# Altium PCB kernel.PcbDoc (part 4 of 7)
Units mil, origin at the board's own origin, x right, y up, seen from the top; angles counter-clockwise.
Board outline 2360 x 2450.34 mil, 6 copper layers (Top Layer, GND, SIGNAL, POWER, GND1, Bottom Layer), stack 32.112 mil thick; 150 components, 174 nets, 684 pads, 710 vias.
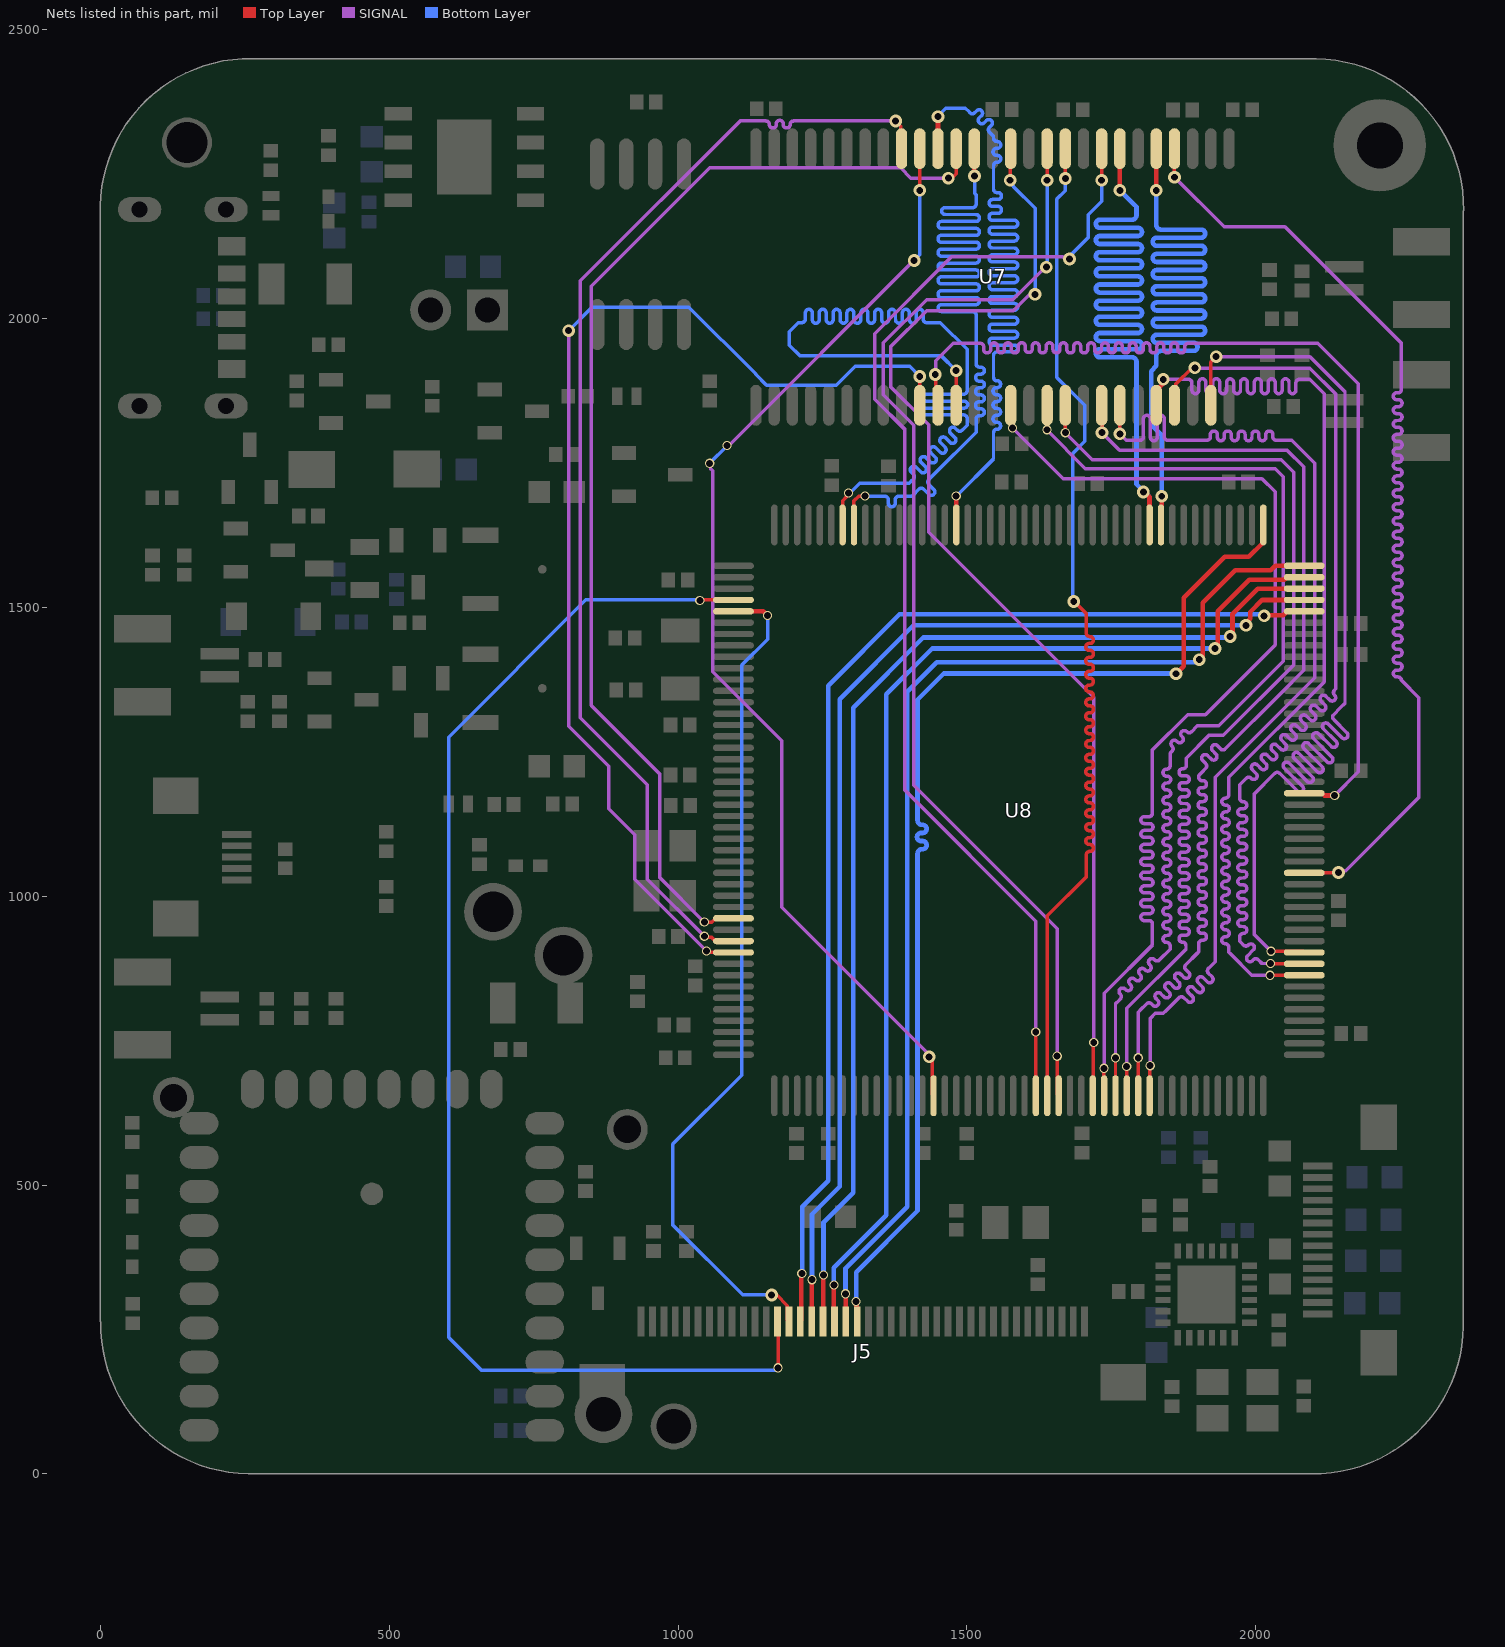
[diagram p7: the nets of this part, all layers, seen from the top]

## Via types
v1: diameter 22, hole 12, Top Layer to Bottom Layer, tented both sides, 583 vias
v2: diameter 16, hole 12, Top Layer to Bottom Layer, tented both sides, 111 vias
v3: diameter 23.62, hole 15.75, Top Layer to Bottom Layer, 8 vias
v4: diameter 28, hole 14, Top Layer to Bottom Layer, 5 vias
v5: diameter 22, hole 12, Top Layer to Bottom Layer, 3 vias

## Nets (pads, with @x,y where several pads share a name; then routed paths per layer and width w, separated by ;. In a path a pad name is that pad's centre, name@x,y a point inside that pad or via, vN(x,y) a via of type N, cw(c..) or ccw(c..) an arc to the next point about the centre after c; other vN are vias at no path point) (continued)
FMC_D1: U7.4 U8.105 | length 2026.3
  Top Layer w6: v1(1859.41,2244.76) U7.4@1859.41,2294.26 ; U8.105@2084.09,1040.59 2084.47,1040.98 2142.83,1040.98 v1(2143.22,1041.36)
  SIGNAL w6: v1(1859.41,2244.76) 1945.41,2158.76 2050.73,2158.76 2252.38,1957.11 2252.38,1887.3 2252.38,1877.69 cw(c2246.38,1877.69) 2246.38,1871.69 2244.33,1871.69 ccw(c2244.33,1865.69) 2244.33,1859.69 2247.38,1859.69 cw(c2247.38,1853.69) 2247.38,1847.69 2244.33,1847.69 ccw(c2244.33,1841.69) 2244.33,1835.69 2247.38,1835.69 cw(c2247.38,1829.69) 2247.38,1823.69 2244.33,1823.69 ccw(c2244.33,1817.69) 2244.33,1811.69 2247.38,1811.69 cw(c2247.38,1805.69) 2247.38,1799.69 2244.33,1799.69 ccw(c2244.33,1793.69) 2244.33,1787.69 2247.38,1787.69 cw(c2247.38,1781.69) 2247.38,1775.69 2244.33,1775.69 ccw(c2244.33,1769.69) 2244.33,1763.69 2247.38,1763.69 cw(c2247.38,1757.69) 2247.38,1751.69 2244.33,1751.69 ccw(c2244.33,1745.69) 2244.33,1739.69 2247.38,1739.69 cw(c2247.38,1733.69) 2247.38,1727.69 2244.33,1727.69 ccw(c2244.33,1721.69) 2244.33,1715.69 2247.38,1715.69 cw(c2247.38,1709.69) 2247.38,1703.69 2244.33,1703.69 ccw(c2244.33,1697.69) 2244.33,1691.69 2247.38,1691.69 cw(c2247.38,1685.69) 2247.38,1679.69 2244.33,1679.69 ccw(c2244.33,1673.69) 2244.33,1667.69 2247.38,1667.69 cw(c2247.38,1661.69) 2247.38,1655.69 2244.33,1655.69 ccw(c2244.33,1649.69) 2244.33,1643.69 2247.38,1643.69 cw(c2247.38,1637.69) 2247.38,1631.69 2244.33,1631.69 ccw(c2244.33,1625.69) 2244.33,1619.69 2247.38,1619.69 cw(c2247.38,1613.69) 2247.38,1607.69 2244.33,1607.69 ccw(c2244.33,1601.69) 2244.33,1595.69 2247.38,1595.69 cw(c2247.38,1589.69) 2247.38,1583.69 2244.33,1583.69 ccw(c2244.33,1577.69) 2244.33,1571.69 2247.38,1571.69 cw(c2247.38,1565.69) 2247.38,1559.69 2244.33,1559.69 ccw(c2244.33,1553.69) 2244.33,1547.69 2247.38,1547.69 cw(c2247.38,1541.69) 2247.38,1535.69 2244.33,1535.69 ccw(c2244.33,1529.69) 2244.33,1523.69 2247.38,1523.69 cw(c2247.38,1517.69) 2247.38,1511.69 2244.33,1511.69 ccw(c2244.33,1505.69) 2244.33,1499.69 2247.38,1499.69 cw(c2247.38,1493.69) 2247.38,1487.69 2244.33,1487.69 ccw(c2244.33,1481.69) 2244.33,1475.69 2247.38,1475.69 cw(c2247.38,1469.69) 2247.38,1463.69 2244.33,1463.69 ccw(c2244.33,1457.69) 2244.33,1451.69 2247.38,1451.69 cw(c2247.38,1445.69) 2247.38,1439.69 2244.33,1439.69 ccw(c2244.33,1433.69) 2244.33,1427.69 2247.38,1427.69 cw(c2247.38,1421.69) 2247.38,1415.69 2244.33,1415.69 ccw(c2244.33,1409.69) 2244.33,1403.69 2247.38,1403.69 cw(c2247.38,1397.69) 2247.38,1391.69 2244.33,1391.69 ccw(c2244.33,1385.69) 2244.33,1379.69 2246.38,1379.69 cw(c2246.38,1373.69) 2252.38,1373.69 2282.27,1343.8 2282.27,1170.98 2155.71,1044.42 2146.28,1044.42 v1(2143.22,1041.36)
FMC_D2: U7.5 U8.142 | length 1978.7
  Top Layer w8: v1(1827.91,2222.22) U7.5@1827.91,2294.26 ; U8.142@1836.06,1642.95 1837.39,1644.28 v1(1837.39,1692.6)
  Bottom Layer w8: v1(1827.91,2222.22) 1827.91,2193.39 1827.91,2162.14 ccw(c1835.91,2162.14) 1835.91,2154.14 1905.6,2154.14 cw(c1905.6,2147.14) 1905.6,2140.14 1828.91,2140.14 ccw(c1828.91,2133.14) 1828.91,2126.14 1905.6,2126.14 cw(c1905.6,2119.14) 1905.6,2112.14 1828.91,2112.14 ccw(c1828.91,2105.14) 1828.91,2098.14 1905.6,2098.14 cw(c1905.6,2091.14) 1905.6,2084.14 1828.91,2084.14 ccw(c1828.91,2077.14) 1828.91,2070.14 1905.6,2070.14 cw(c1905.6,2063.14) 1905.6,2056.14 1828.91,2056.14 ccw(c1828.91,2049.14) 1828.91,2042.14 1905.6,2042.14 cw(c1905.6,2035.14) 1905.6,2028.14 1828.91,2028.14 ccw(c1828.91,2021.14) 1828.91,2014.14 1905.6,2014.14 cw(c1905.6,2007.14) 1905.6,2000.14 1828.91,2000.14 ccw(c1828.91,1993.14) 1828.91,1986.14 1905.6,1986.14 cw(c1905.6,1979.14) 1905.6,1972.14 1828.91,1972.14 ccw(c1828.91,1965.14) 1828.91,1958.14 1892.37,1958.14 cw(c1892.37,1951.14) 1892.37,1944.14 1835.91,1944.14 ccw(c1835.91,1936.14) 1827.91,1936.14 1827.91,1918.14 1819,1909.23 1819,1816.65 1837.39,1798.26 v1(1837.39,1692.6)
FMC_D3: U7.7 U8.143 | length 1997.7
  Top Layer w8: v1(1764.92,2222.22) U7.7@1764.92,2294.26 ; v1(1805.5,1699.96) 1807.46,1699.96 1816.11,1691.31 1816.11,1643.23 U8.143@1816.38,1642.95
  Bottom Layer w8: v1(1764.92,2222.22) 1789.98,2197.15 1793.74,2193.39 1793.74,2179.15 cw(c1785.74,2179.15) 1785.74,2171.15 1730.28,2171.15 ccw(c1730.28,2164.15) 1730.28,2157.15 1796.25,2157.15 cw(c1796.25,2150.15) 1796.25,2143.15 1730.28,2143.15 ccw(c1730.28,2136.15) 1730.28,2129.15 1796.25,2129.15 cw(c1796.25,2122.15) 1796.25,2115.15 1730.28,2115.15 ccw(c1730.28,2108.15) 1730.28,2101.15 1796.25,2101.15 cw(c1796.25,2094.15) 1796.25,2087.15 1730.28,2087.15 ccw(c1730.28,2080.15) 1730.28,2073.15 1796.25,2073.15 cw(c1796.25,2066.15) 1796.25,2059.15 1730.28,2059.15 ccw(c1730.28,2052.15) 1730.28,2045.15 1796.25,2045.15 cw(c1796.25,2038.15) 1796.25,2031.15 1730.28,2031.15 ccw(c1730.28,2024.15) 1730.28,2017.15 1796.25,2017.15 cw(c1796.25,2010.15) 1796.25,2003.15 1730.28,2003.15 ccw(c1730.28,1996.15) 1730.28,1989.15 1796.25,1989.15 cw(c1796.25,1982.15) 1796.25,1975.15 1730.28,1975.15 ccw(c1730.28,1968.15) 1730.28,1961.15 1796.25,1961.15 cw(c1796.25,1954.15) 1796.25,1947.15 1730.28,1947.15 ccw(c1730.28,1940.15) 1730.28,1933.15 1785.74,1933.15 cw(c1785.74,1925.15) 1793.74,1925.15 1793.74,1912.24 1793.74,1713.68 1815.84,1691.58
FMC_D4: U7.8 U8.68 | length 2039.8
  Top Layer w6: U8.68@1619.53,654.77 v2@1619.53,765 ; v1(1733.43,2239.63) U7.8@1733.43,2294.26
  SIGNAL w6: v2@1619.53,765 1619.53,956.74 1392.85,1183.42 1392.85,1808.18 1340.6,1860.43 1340.6,1974.17 1473.49,2107.06 1666.3,2107.06 1666.86,2106.5 1674.76,2106.5 v1(1677.82,2103.44)
  Bottom Layer w6: v1@1676.52,2106.68 1710.28,2140.45 1710.28,2179.82 1733.43,2202.96 v1(1733.43,2239.63)
  other v2: 1619.28,765.26
FMC_D5: U7.10 U8.69 | length 1974.3
  Top Layer w6: U8.69@1639.21,654.77 1639.21,966.17 1707.1,1034.07 1707.1,1057.98 ; v1(1670.43,2242.57) U7.10@1670.43,2294.26 ; v1(1685.04,1510.5) 1685.45,1510.5 1707.1,1488.84 1707.1,1466.67 ; 1706.82,1056.7 1706.82,1071.7 cw(c1712.82,1071.7) 1712.82,1077.7 1713.21,1077.7 ccw(c1713.21,1083.7) 1713.21,1089.7 1711.82,1089.7 cw(c1711.82,1095.7) 1711.82,1101.7 1713.21,1101.7 ccw(c1713.21,1107.7) 1713.21,1113.7 1711.82,1113.7 cw(c1711.82,1119.7) 1711.82,1125.7 1713.21,1125.7 ccw(c1713.21,1131.7) 1713.21,1137.7 1711.82,1137.7 cw(c1711.82,1143.7) 1711.82,1149.7 1713.21,1149.7 ccw(c1713.21,1155.7) 1713.21,1161.7 1711.82,1161.7 cw(c1711.82,1167.7) 1711.82,1173.7 1713.21,1173.7 ccw(c1713.21,1179.7) 1713.21,1185.7 1711.82,1185.7 cw(c1711.82,1191.7) 1711.82,1197.7 1713.21,1197.7 ccw(c1713.21,1203.7) 1713.21,1209.7 1711.82,1209.7 cw(c1711.82,1215.7) 1711.82,1221.7 1713.21,1221.7 ccw(c1713.21,1227.7) 1713.21,1233.7 1711.82,1233.7 cw(c1711.82,1239.7) 1711.82,1245.7 1713.21,1245.7 ccw(c1713.21,1251.7) 1713.21,1257.7 1711.82,1257.7 cw(c1711.82,1263.7) 1711.82,1269.7 1713.21,1269.7 ccw(c1713.21,1275.7) 1713.21,1281.7 1711.82,1281.7 cw(c1711.82,1287.7) 1711.82,1293.7 1713.21,1293.7 ccw(c1713.21,1299.7) 1713.21,1305.7 1711.82,1305.7 cw(c1711.82,1311.7) 1711.82,1317.7 1713.21,1317.7 ccw(c1713.21,1323.7) 1713.21,1329.7 1711.82,1329.7 cw(c1711.82,1335.7) 1711.82,1341.7 1713.21,1341.7 ccw(c1713.21,1347.7) 1713.21,1353.7 1711.82,1353.7 cw(c1711.82,1359.7) 1711.82,1365.7 1713.21,1365.7 ccw(c1713.21,1371.7) 1713.21,1377.7 1711.82,1377.7 cw(c1711.82,1383.7) 1711.82,1389.7 1713.21,1389.7 ccw(c1713.21,1395.7) 1713.21,1401.7 1711.82,1401.7 cw(c1711.82,1407.7) 1711.82,1413.7 1713.21,1413.7 ccw(c1713.21,1419.7) 1713.21,1425.7 1711.82,1425.7 cw(c1711.82,1431.7) 1711.82,1437.7 1713.21,1437.7 ccw(c1713.21,1443.7) 1713.21,1449.7 1712.82,1449.7 cw(c1712.82,1455.7) 1706.82,1455.7 1706.82,1465.38
  Bottom Layer w6: v1(1670.43,2242.57) 1670.43,2221.52 1655.97,2207.06 1655.97,1898.2 1704.17,1850 1704.17,1787.54 1683.12,1766.49 1683.12,1512.42 v1(1685.04,1510.5)
FMC_D6: U7.11 U8.70 | length 1971.1
  Top Layer w6: v1(1638.94,2239.63) U7.11@1638.94,2294.26 ; v2(1656.31,723.26) 1656.31,657.36 U8.70@1658.9,654.77
  SIGNAL w6: v1(1637.65,2089.06) 1635.88,2089.06 1579.61,2032.79 1430.29,2032.79 1355.47,1957.97 1355.47,1867.98 1408.17,1815.27 1408.17,1192.13 1656.31,944 v2(1656.31,723.26)
  Bottom Layer w6: v1(1637.65,2089.06) 1637.65,2092.06 1638.94,2093.35 v1(1638.94,2239.63)
FMC_D7: U7.13 U8.73 | length 2001.1
  Top Layer w6: v1(1575,2239.63) 1575,2293.31 U7.13@1575.95,2294.26 ; U8.73@1717.95,654.77 1718.81,655.63 1718.81,746.21 v2(1719.66,747.06)
  SIGNAL w6: v1(1618.08,2042.07) 1608.67,2042.07 1580.22,2013.63 1430.27,2013.63 1367.89,1951.26 1367.89,1882.06 1433.83,1816.12 1433.83,1630.08 1719.66,1344.25 v2(1719.66,747.06)
  Bottom Layer w6: v1(1575,2239.63) 1575,2235.3 1580.5,2229.8 1580.5,2228.85 1618.08,2191.27 v1(1618.08,2042.07)
FMC_D8: U7.42 U8.74 | length 1982.7
  Top Layer w6: U7.42@1575.95,1850 1578.09,1847.86 1578.09,1811.76 v2(1579.24,1810.61) ; v2(1737.26,702.21) 1737.26,655.16 U8.74@1737.64,654.77
  SIGNAL w6: v2(1579.24,1810.61) 1666.7,1723.15 2010.91,1723.15 2033.59,1700.48 2033.59,1435.02 1913.08,1314.51 1882.08,1314.51 1821.34,1253.78 1821.34,1158.97 1821.34,1143.96 cw(c1815.34,1143.96) 1815.34,1137.96 1807.12,1137.96 ccw(c1807.12,1131.96) 1807.12,1125.96 1816.34,1125.96 cw(c1816.34,1119.96) 1816.34,1113.96 1807.12,1113.96 ccw(c1807.12,1107.96) 1807.12,1101.96 1816.34,1101.96 cw(c1816.34,1095.96) 1816.34,1089.96 1807.12,1089.96 ccw(c1807.12,1083.96) 1807.12,1077.96 1816.34,1077.96 cw(c1816.34,1071.96) 1816.34,1065.96 1807.12,1065.96 ccw(c1807.12,1059.96) 1807.12,1053.96 1816.34,1053.96 cw(c1816.34,1047.96) 1816.34,1041.96 1807.12,1041.96 ccw(c1807.12,1035.96) 1807.12,1029.96 1816.34,1029.96 cw(c1816.34,1023.96) 1816.34,1017.96 1807.12,1017.96 ccw(c1807.12,1011.96) 1807.12,1005.96 1816.34,1005.96 cw(c1816.34,999.96) 1816.34,993.96 1807.12,993.96 ccw(c1807.12,987.96) 1807.12,981.96 1816.34,981.96 cw(c1816.34,975.96) 1816.34,969.96 1807.12,969.96 ccw(c1807.12,963.96) 1807.12,957.96 1815.34,957.96 cw(c1815.34,951.96) 1821.34,951.96 1821.34,922.3 1821.34,915.71 1737.64,832 1737.64,702.59 v2(1737.26,702.21)
FMC_D9: U7.44 U8.75 | length 2006.5
  Top Layer w6: v2(1638.94,1807.67) U7.44@1638.94,1850 ; U8.75@1757.32,654.77 v2(1757.32,720.34)
  SIGNAL w6: v2(1638.94,1807.67) 1638.94,1806.56 1705.2,1740.3 2033.55,1740.3 2047.85,1726 2047.85,1407.12 1935.74,1295.01 1899.16,1295.01 1898.27,1294.11 1889.22,1285.07 cw(c1884.98,1289.31) 1880.74,1285.07 1880.56,1285.24 ccw(c1876.32,1281) 1872.08,1276.76 1872.96,1275.87 cw(c1868.72,1271.63) 1872.96,1267.39 cw(c1868.72,1271.63) 1864.47,1267.39 ; v2(1757.32,720.34) 1757.32,813.76 1763.56,820 1765.68,822.12 ccw(c1761.44,826.36) 1765.68,830.61 1765.27,831.01 cw(c1769.52,835.26) 1765.27,839.5 cw(c1769.52,835.26) 1773.76,839.5 1774.87,838.39 ccw(c1779.12,842.63) 1783.36,838.39 ccw(c1779.12,842.63) 1783.36,846.87 1782.24,847.99 cw(c1786.49,852.23) 1790.73,856.47 1791.84,855.36 ccw(c1796.09,859.6) 1800.33,855.36 ccw(c1796.09,859.6) 1800.33,863.84 1799.21,864.96 cw(c1803.46,869.2) 1799.21,873.44 cw(c1803.46,869.2) 1807.7,873.44 1808.81,872.33 ccw(c1813.06,876.57) 1817.3,872.33 ccw(c1813.06,876.57) 1817.3,880.81 1816.18,881.93 cw(c1820.43,886.17) 1816.18,890.41 cw(c1820.43,886.17) 1824.67,890.41 1825.08,890 ccw(c1829.32,894.25) 1833.56,890 1851.9,908.34 1851.9,910.51 1851.9,911.1 1851.9,914.1 ccw(c1845.9,914.1) 1845.9,920.1 1845.52,920.1 cw(c1845.52,926.1) 1845.52,932.1 1846.9,932.1 ccw(c1846.9,938.1) 1846.9,944.1 1845.52,944.1 cw(c1845.52,950.1) 1845.52,956.1 1846.9,956.1 ccw(c1846.9,962.1) 1846.9,968.1 1845.52,968.1 cw(c1845.52,974.1) 1845.52,980.1 1846.9,980.1 ccw(c1846.9,986.1) 1846.9,992.1 1845.52,992.1 cw(c1845.52,998.1) 1845.52,1004.1 1846.9,1004.1 ccw(c1846.9,1010.1) 1846.9,1016.1 1845.52,1016.1 cw(c1845.52,1022.1) 1845.52,1028.1 1846.9,1028.1 ccw(c1846.9,1034.1) 1846.9,1040.1 1845.52,1040.1 cw(c1845.52,1046.1) 1845.52,1052.1 1846.9,1052.1 ccw(c1846.9,1058.1) 1846.9,1064.1 1845.52,1064.1 cw(c1845.52,1070.1) 1845.52,1076.1 1846.9,1076.1 ccw(c1846.9,1082.1) 1846.9,1088.1 1845.52,1088.1 cw(c1845.52,1094.1) 1845.52,1100.1 1846.9,1100.1 ccw(c1846.9,1106.1) 1846.9,1112.1 1845.52,1112.1 cw(c1845.52,1118.1) 1845.52,1124.1 1846.9,1124.1 ccw(c1846.9,1130.1) 1846.9,1136.1 1845.52,1136.1 cw(c1845.52,1142.1) 1845.52,1148.1 1846.9,1148.1 ccw(c1846.9,1154.1) 1846.9,1160.1 1845.52,1160.1 cw(c1845.52,1166.1) 1845.52,1172.1 1846.9,1172.1 ccw(c1846.9,1178.1) 1846.9,1184.1 1845.52,1184.1 cw(c1845.52,1190.1) 1845.52,1196.1 1846.9,1196.1 ccw(c1846.9,1202.1) 1846.9,1208.1 1845.52,1208.1 cw(c1845.52,1214.1) 1845.52,1220.1 1845.9,1220.1 ccw(c1845.9,1226.1) 1851.9,1226.1 1851.9,1247.74 1853.16,1249 1855.28,1251.12 ; 1855.28,1251.13 ccw(c1851.04,1255.37) 1855.28,1259.61 1855.11,1259.79 cw(c1859.35,1264.03) 1855.1,1268.27 cw(c1859.35,1264.03) 1863.59,1268.27 1864.47,1267.39
FMC_D10: U7.45 U8.76 | length 2001
  Top Layer w6: v2(1670.43,1802.6) U7.45@1670.43,1850 ; v2(1776.72,705.21) 1776.72,655.06 U8.76@1777.01,654.77
  SIGNAL w6: v2(1670.43,1802.6) 1717.3,1755.73 2044.22,1755.73 2065.97,1733.97 2065.97,1400.47 1944.12,1278.62 1919.17,1278.62 1879.84,1239.29 1879.84,1236.29 1879.82,1226.6 cw(c1873.82,1226.61) 1873.82,1220.61 1873.3,1220.61 ccw(c1873.3,1214.61) 1873.3,1208.61 1879.03,1208.61 cw(c1879.03,1202.61) 1879.03,1196.61 1873.3,1196.61 ccw(c1873.3,1190.61) 1873.3,1184.61 1879.03,1184.61 cw(c1879.03,1178.61) 1879.03,1172.61 1873.3,1172.61 ccw(c1873.3,1166.61) 1873.3,1160.61 1879.03,1160.61 cw(c1879.03,1154.61) 1879.03,1148.61 1873.3,1148.61 ccw(c1873.3,1142.61) 1873.3,1136.61 1879.03,1136.61 cw(c1879.03,1130.61) 1879.03,1124.61 1873.3,1124.61 ccw(c1873.3,1118.61) 1873.3,1112.61 1879.03,1112.61 cw(c1879.03,1106.61) 1879.03,1100.61 1873.3,1100.61 ccw(c1873.3,1094.61) 1873.3,1088.61 1879.03,1088.61 cw(c1879.03,1082.61) 1879.03,1076.61 1873.3,1076.61 ccw(c1873.3,1070.61) 1873.3,1064.61 1879.03,1064.61 cw(c1879.03,1058.61) 1879.03,1052.61 1873.3,1052.61 ccw(c1873.3,1046.61) 1873.3,1040.61 1879.03,1040.61 cw(c1879.03,1034.61) 1879.03,1028.61 1873.3,1028.61 ccw(c1873.3,1022.61) 1873.3,1016.61 1879.03,1016.61 cw(c1879.03,1010.61) 1879.03,1004.61 1873.3,1004.61 ccw(c1873.3,998.61) 1873.3,992.61 1879.03,992.61 cw(c1879.03,986.61) 1879.03,980.61 1873.3,980.61 ccw(c1873.3,974.61) 1873.3,968.61 1879.03,968.61 cw(c1879.03,962.61) 1879.03,956.61 1873.3,956.61 ccw(c1873.3,950.61) 1873.3,944.61 1879.03,944.61 cw(c1879.03,938.61) 1879.03,932.61 1873.3,932.61 ccw(c1873.3,926.61) 1873.3,920.61 1873.37,920.61 cw(c1873.37,914.61) 1879.37,914.6 1879.36,911.61 1879.36,908.61 1776.72,805.95 v2(1776.72,705.21)
FMC_D11: U7.47 U8.77 | length 2019.7
  Top Layer w6: U7.47@1733.43,1850 1734.09,1849.34 v1(1734.09,1802.69) v1@1734.66,1802.12 ; U8.77@1796.69,654.77 v2(1796.69,720.34)
  SIGNAL w6: v1@1734.66,1802.12 1764.35,1772.43 2054.32,1772.43 2083.38,1743.37 2083.38,1391.07 2043.05,1350.74 1947.59,1255.28 cw(c1943.35,1259.52) 1939.11,1255.28 1933.84,1260.54 ccw(c1929.6,1256.3) 1925.36,1260.54 ccw(c1929.6,1256.3) 1925.36,1252.06 1931.33,1246.09 cw(c1927.09,1241.85) 1931.33,1237.6 cw(c1927.09,1241.85) 1922.84,1237.6 1916.87,1243.57 ccw(c1912.63,1239.33) 1908.39,1235.09 1913.65,1229.83 cw(c1909.41,1225.58) 1913.65,1221.34 1907.4,1215.09 1905.28,1212.97 1901.36,1209.05 1901.36,1206.05 ccw(c1907.36,1206.05) 1907.36,1200.05 1908.81,1200.05 cw(c1908.81,1194.05) 1908.81,1188.05 1906.36,1188.05 ccw(c1906.36,1182.05) 1906.36,1176.05 1908.81,1176.05 cw(c1908.81,1170.05) 1908.81,1164.05 1906.36,1164.05 ccw(c1906.36,1158.05) 1906.36,1152.05 1908.81,1152.05 cw(c1908.81,1146.05) 1908.81,1140.05 1906.36,1140.05 ccw(c1906.36,1134.05) 1906.36,1128.05 1908.81,1128.05 cw(c1908.81,1122.05) 1908.81,1116.05 1906.36,1116.05 ccw(c1906.36,1110.05) 1906.36,1104.05 1908.81,1104.05 cw(c1908.81,1098.05) 1908.81,1092.05 1906.36,1092.05 ccw(c1906.36,1086.05) 1906.36,1080.05 1908.81,1080.05 cw(c1908.81,1074.05) 1908.81,1068.05 1906.36,1068.05 ccw(c1906.36,1062.05) 1906.36,1056.05 1908.81,1056.05 cw(c1908.81,1050.05) 1908.81,1044.05 1906.36,1044.05 ccw(c1906.36,1038.05) 1906.36,1032.05 1908.81,1032.05 cw(c1908.81,1026.05) 1908.81,1020.05 1906.36,1020.05 ccw(c1906.36,1014.05) 1906.36,1008.05 1908.81,1008.05 cw(c1908.81,1002.05) 1908.81,996.05 1906.36,996.05 ccw(c1906.36,990.05) 1906.36,984.05 1908.81,984.05 cw(c1908.81,978.05) 1908.81,972.05 1906.36,972.05 ccw(c1906.36,966.05) 1906.36,960.05 1908.81,960.05 cw(c1908.81,954.05) 1908.81,948.05 1906.36,948.05 ccw(c1906.36,942.05) 1906.36,936.05 1908.81,936.05 cw(c1908.81,930.05) 1908.81,924.05 1907.36,924.05 ccw(c1907.36,918.05) 1901.36,918.05 1901.36,903.96 1899.24,901.84 1879.06,881.68 ccw(c1883.3,877.44) 1879.06,873.19 1884.14,868.12 cw(c1879.89,863.87) 1884.14,859.63 cw(c1879.89,863.87) 1875.65,859.63 1869.82,865.46 ccw(c1865.58,861.21) 1861.34,865.46 ccw(c1865.58,861.21) 1861.34,856.97 1867.17,851.14 cw(c1862.92,846.9) 1867.17,842.66 cw(c1862.92,846.9) 1858.68,842.66 1852.85,848.49 ccw(c1848.61,844.24) 1844.37,848.49 ccw(c1848.61,844.24) 1844.37,840 1850.2,834.17 cw(c1845.95,829.93) 1841.71,825.69 1835.88,831.52 ccw(c1831.64,827.27) 1827.4,831.52 ccw(c1831.64,827.27) 1827.4,823.03 1830.39,820.04 cw(c1826.15,815.79) 1830.39,811.55 cw(c1826.15,815.79) 1821.91,811.55 1819.63,813.83 ccw(c1815.38,809.59) 1811.14,813.83 1800.53,803.23 1798.41,801.11 1796.69,799.39 v2(1796.69,720.34)
FMC_D12: U7.48 U8.78 | length 1996.7
  Top Layer w6: v1(1764.92,1800.5) U7.48@1764.92,1850 ; U8.78@1816.38,654.77 1816.76,655.15 v2@1816.76,706.72
  SIGNAL w6: v1(1764.92,1800.5) 1775.85,1789.57 1796.69,1789.57 1799.69,1789.57 ccw(c1799.69,1795.57) 1805.69,1795.57 1805.69,1826.72 cw(c1811.69,1826.72) 1817.69,1826.72 1817.69,1794.57 ccw(c1823.69,1794.57) 1829.69,1794.57 1829.69,1826.72 cw(c1835.69,1826.72) 1841.69,1826.72 1841.69,1795.57 ccw(c1847.69,1795.57) 1847.69,1789.57 1864.84,1789.57 1912.63,1789.57 1915.63,1789.57 ccw(c1915.63,1795.57) 1921.63,1795.57 1921.63,1799.44 cw(c1927.63,1799.44) 1933.63,1799.44 1933.63,1794.57 ccw(c1939.63,1794.57) 1945.63,1794.57 1945.63,1799.44 cw(c1951.63,1799.44) 1957.63,1799.44 1957.63,1794.57 ccw(c1963.63,1794.57) 1969.63,1794.57 1969.63,1799.44 cw(c1975.63,1799.44) 1981.63,1799.44 1981.63,1794.57 ccw(c1987.63,1794.57) 1993.63,1794.57 1993.63,1799.44 cw(c1999.63,1799.44) 2005.63,1799.44 2005.63,1794.57 ccw(c2011.63,1794.57) 2017.63,1794.57 2017.63,1799.44 cw(c2023.63,1799.44) 2029.63,1799.44 2029.63,1795.57 ccw(c2035.63,1795.57) 2035.63,1789.57 2053.6,1789.57 2062.16,1789.57 2102.05,1749.68 2102.05,1378.32 1929.69,1205.96 1929.69,886.72 1920.33,877.36 1918.21,875.23 ccw(c1922.45,870.99) 1918.21,866.75 1924.51,860.45 cw(c1920.26,856.21) 1924.51,851.97 cw(c1920.26,856.21) 1916.02,851.97 1909.02,858.97 ccw(c1904.77,854.73) 1900.53,858.97 ccw(c1904.77,854.73) 1900.53,850.49 1907.53,843.48 cw(c1903.29,839.24) 1899.05,835 1892.04,842 ccw(c1887.8,837.76) 1883.56,842 ccw(c1887.8,837.76) 1883.56,833.52 1890.56,826.51 cw(c1886.32,822.27) 1890.56,818.03 cw(c1886.32,822.27) 1882.08,818.03 1875.78,824.32 ccw(c1871.54,820.08) 1867.3,824.32 1843.97,800.99 1840.29,797.31 1826.48,797.31 1817.14,787.97 1817.14,706.92 v2(1817.34,706.72)
FMC_D13: U7.50 U8.96 | length 2018.9
  Top Layer w6: v2(2024.67,863.22) U8.96@2084.57,863.22
  Top Layer w8: U7.50@1827.91,1850 1827.91,1875.59 1840,1887.68 v1(1840,1895)
  SIGNAL w6: v1(1840,1895) 1840.13,1894.87 1868.72,1894.87 1883.72,1894.87 cw(c1883.72,1888.87) 1889.72,1888.87 1889.72,1876.2 ccw(c1895.72,1876.2) 1901.72,1876.2 1901.72,1889.87 cw(c1907.72,1889.87) 1913.72,1889.87 1913.72,1876.2 ccw(c1919.72,1876.2) 1925.72,1876.2 1925.72,1889.87 cw(c1931.72,1889.87) 1937.72,1889.87 1937.72,1876.2 ccw(c1943.72,1876.2) 1949.72,1876.2 1949.72,1889.87 cw(c1955.72,1889.87) 1961.72,1889.87 1961.72,1876.2 ccw(c1967.72,1876.2) 1973.72,1876.2 1973.72,1889.87 cw(c1979.72,1889.87) 1985.72,1889.87 1985.72,1876.2 ccw(c1991.72,1876.2) 1997.72,1876.2 1997.72,1889.87 cw(c2003.72,1889.87) 2009.72,1889.87 2009.72,1876.2 ccw(c2015.72,1876.2) 2021.72,1876.2 2021.72,1889.87 cw(c2027.72,1889.87) 2033.72,1889.87 2033.72,1876.2 ccw(c2039.72,1876.2) 2045.72,1876.2 2045.72,1889.87 cw(c2051.72,1889.87) 2057.72,1889.87 2057.72,1876.2 ccw(c2063.72,1876.2) 2069.72,1876.2 2069.72,1888.87 cw(c2075.72,1888.87) 2075.72,1894.87 2088.41,1894.87 2093.28,1894.87 2118.41,1869.73 2118.41,1371 1953.33,1205.92 1953.33,1190.98 1953.33,1175.98 cw(c1947.33,1175.98) 1947.33,1169.98 ; 1947.31,917.98 cw(c1947.31,923.98) 1947.31,929.98 1948.33,929.98 ccw(c1948.33,935.98) 1948.33,941.98 1947.31,941.98 cw(c1947.31,947.98) 1947.31,953.98 1948.33,953.98 ccw(c1948.33,959.98) 1948.33,965.98 1947.31,965.98 cw(c1947.31,971.98) 1947.31,977.98 1948.33,977.98 ccw(c1948.33,983.98) 1948.33,989.98 1947.31,989.98 cw(c1947.31,995.98) 1947.31,1001.98 1948.33,1001.98 ccw(c1948.33,1007.98) 1948.33,1013.98 1947.31,1013.98 cw(c1947.31,1019.98) 1947.31,1025.98 1948.33,1025.98 ccw(c1948.33,1031.98) 1948.33,1037.98 1947.31,1037.98 cw(c1947.31,1043.98) 1947.31,1049.98 1948.33,1049.98 ccw(c1948.33,1055.98) 1948.33,1061.98 1947.31,1061.98 cw(c1947.31,1067.98) 1947.31,1073.98 1948.33,1073.98 ccw(c1948.33,1079.98) 1948.33,1085.98 1947.31,1085.98 cw(c1947.31,1091.98) 1947.31,1097.98 1948.33,1097.98 ccw(c1948.33,1103.98) 1948.33,1109.98 1947.31,1109.98 cw(c1947.31,1115.98) 1947.31,1121.98 1948.33,1121.98 ccw(c1948.33,1127.98) 1948.33,1133.98 1947.31,1133.98 cw(c1947.31,1139.98) 1947.31,1145.98 1948.33,1145.98 ccw(c1948.33,1151.98) 1948.33,1157.98 1947.31,1157.98 cw(c1947.31,1163.98) 1947.31,1169.98 ; 1947.33,917.98 cw(c1947.33,911.98) 1953.33,911.98 1953.33,903.43 1956.64,900.12 1993.44,863.32 v2@2024.55,863.32
FMC_D14: U7.51 U8.97 | length 1996.9
  Top Layer w6: U7.51@1859.41,1850 1862.03,1852.62 1862.03,1887.02 1889.88,1914.87 v1(1894.67,1914.87) ; v2(2025.46,883.62) 2025.72,883.37 2083.85,883.37 U8.97@2084.47,882.74
  SIGNAL w6: v1(1894.67,1914.87) 1895.34,1914.2 2093.85,1914.2 2138.45,1869.61 2138.45,1359.11 2136.32,1356.98 ccw(c2140.57,1352.74) 2136.32,1348.5 2136.57,1348.25 cw(c2132.33,1344.01) 2136.57,1339.77 cw(c2132.33,1344.01) 2128.09,1339.77 2121.65,1346.21 ccw(c2117.4,1341.96) 2113.16,1346.21 ccw(c2117.4,1341.96) 2113.16,1337.72 2119.6,1331.28 cw(c2115.36,1327.04) 2111.12,1322.79 2104.68,1329.24 ccw(c2100.43,1324.99) 2096.19,1329.24 ccw(c2100.43,1324.99) 2096.19,1320.75 2102.63,1314.31 cw(c2098.39,1310.07) 2102.63,1305.82 cw(c2098.39,1310.07) 2094.15,1305.82 2087.7,1312.27 ccw(c2083.46,1308.02) 2079.22,1312.27 ccw(c2083.46,1308.02) 2079.22,1303.78 2085.66,1297.34 cw(c2081.42,1293.1) 2085.66,1288.85 cw(c2081.42,1293.1) 2077.18,1288.85 2070.73,1295.3 ccw(c2066.49,1291.05) 2062.25,1286.81 2068.69,1280.37 cw(c2064.45,1276.13) 2068.69,1271.88 cw(c2064.45,1276.13) 2060.21,1271.88 2053.76,1278.32 ccw(c2049.52,1274.08) 2045.28,1278.32 ccw(c2049.52,1274.08) 2045.28,1269.84 2051.72,1263.4 cw(c2047.48,1259.16) 2051.72,1254.91 cw(c2047.48,1259.15) 2043.23,1254.91 2036.79,1261.35 ccw(c2032.55,1257.11) 2028.31,1261.35 ccw(c2032.55,1257.11) 2028.31,1252.87 2034.75,1246.43 cw(c2030.51,1242.18) 2034.75,1237.94 cw(c2030.51,1242.18) 2026.26,1237.94 2019.82,1244.38 ccw(c2015.58,1240.14) 2011.34,1235.9 2017.78,1229.46 cw(c2013.54,1225.21) 2017.78,1220.97 cw(c2013.54,1225.21) 2009.29,1220.97 2002.85,1227.41 ccw(c1998.61,1223.17) 1994.37,1227.41 ccw(c1998.61,1223.17) 1994.37,1218.93 2000.81,1212.49 cw(c1996.57,1208.24) 2000.81,1204 cw(c1996.57,1208.24) 1992.32,1204 1992.07,1204.25 ccw(c1987.83,1200.01) 1983.59,1204.25 1975.73,1196.39 1972.51,1193.17 1972.51,1191.31 1972.51,1169.68 ccw(c1978.51,1169.68) 1978.51,1163.68 1978.66,1163.68 cw(c1978.66,1157.68) 1978.66,1151.68 1975.15,1151.68 ccw(c1975.15,1145.68) 1975.15,1139.68 1978.66,1139.68 cw(c1978.66,1133.68) 1978.66,1127.68 1975.15,1127.68 ccw(c1975.15,1121.68) 1975.15,1115.68 1978.66,1115.68 cw(c1978.66,1109.68) 1978.66,1103.68 1975.15,1103.68 ccw(c1975.15,1097.68) 1975.15,1091.68 1978.66,1091.68 cw(c1978.66,1085.68) 1978.66,1079.68 1975.15,1079.68 ccw(c1975.15,1073.68) 1975.15,1067.68 1978.66,1067.68 cw(c1978.66,1061.68) 1978.66,1055.68 1975.15,1055.68 ccw(c1975.15,1049.68) 1975.15,1043.68 1978.66,1043.68 cw(c1978.66,1037.68) 1978.66,1031.68 1975.15,1031.68 ccw(c1975.15,1025.68) 1975.15,1019.68 1978.66,1019.68 cw(c1978.66,1013.68) 1978.66,1007.68 1975.15,1007.68 ccw(c1975.15,1001.68) 1975.15,995.68 1978.66,995.68 cw(c1978.66,989.68) 1978.66,983.68 1975.15,983.68 ccw(c1975.15,977.68) 1975.15,971.68 1978.66,971.68 cw(c1978.66,965.68) 1978.66,959.68 1975.15,959.68 ccw(c1975.15,953.68) 1975.15,947.68 1978.66,947.68 cw(c1978.66,941.68) 1978.66,935.68 1978.51,935.68 ccw(c1978.51,929.68) 1972.51,929.68 1972.51,922.02 1976.86,917.68 1978.98,915.55 ccw(c1983.23,919.8) 1987.47,915.55 1987.65,915.74 cw(c1991.89,911.49) 1996.14,915.74 cw(c1991.89,911.49) 1996.14,907.25 1985.95,897.06 ccw(c1990.19,892.82) 1985.95,888.58 ccw(c1990.19,892.82) 1994.43,888.58 1995.95,890.1 cw(c2000.2,885.86) 2004.44,890.1 2010.92,883.62 v2(2025.46,883.62)
FMC_D15: U7.53 U8.98 | length 2008.3
  Top Layer w6: U7.53@1922.4,1850 1922.4,1924.95 v1(1931.64,1934.2) ; v2(2026.56,904.86) 2082.04,904.86 U8.98@2084.09,902.8
  SIGNAL w6: v1(1931.64,1934.2) 2094.04,1934.2 2154.67,1873.57 2154.67,1457.69 2154.67,1344.97 2154.67,1334.27 2146.68,1326.28 2135,1314.59 ccw(c2139.24,1310.35) 2135,1306.11 2157.96,1283.14 cw(c2153.72,1278.9) 2157.96,1274.66 cw(c2153.72,1278.9) 2149.48,1274.66 2125.8,1298.33 ccw(c2121.56,1294.09) 2117.32,1298.33 ccw(c2121.56,1294.09) 2117.32,1289.84 2139.17,1268 cw(c2134.92,1263.75) 2139.17,1259.51 cw(c2134.92,1263.75) 2130.68,1259.51 2108.83,1281.36 ccw(c2104.59,1277.12) 2100.35,1272.87 2132.05,1241.18 cw(c2127.8,1236.93) 2132.05,1232.69 cw(c2127.8,1236.93) 2123.56,1232.69 2091.86,1264.39 ccw(c2087.62,1260.15) 2083.38,1264.39 ccw(c2087.62,1260.15) 2083.38,1255.9 2115.07,1224.21 cw(c2110.83,1219.96) 2115.07,1215.72 cw(c2110.83,1219.96) 2106.59,1215.72 2074.89,1247.42 ccw(c2070.65,1243.18) 2066.41,1247.42 ccw(c2070.65,1243.18) 2066.41,1238.93 2098.1,1207.24 cw(c2093.86,1202.99) 2098.1,1198.75 cw(c2093.86,1202.99) 2089.62,1198.75 2057.92,1230.45 ccw(c2053.68,1226.2) 2049.44,1221.96 2081.13,1190.26 cw(c2076.89,1186.02) 2081.13,1181.78 cw(c2076.89,1186.02) 2072.65,1181.78 2041.66,1212.77 ccw(c2037.41,1208.53) 2033.17,1212.77 1997.15,1176.75 1997.15,1163.94 1997.15,1154.61 1997.15,1089.97 1997.15,934.27 v2(2026.56,904.86)
FMC_NBL0: U7.15 U8.169 | length 1976.7
  Top Layer w6: U8.169@1304.57,1642.95 1304.57,1684.57 1312.6,1692.6 v2@1323.98,1692.6
  Top Layer w8: U7.15@1512.95,2294.26 1512.95,2247.31 v1(1513.42,2246.84)
  Bottom Layer w6: v2@1323.73,1692.6 1343.14,1692.6 1358.14,1692.6 cw(c1358.14,1686.6) 1364.14,1686.6 1364.14,1680.35 ccw(c1370.14,1680.35) 1376.14,1680.35 1376.14,1686.6 cw(c1382.14,1686.6) 1382.14,1692.6 1403.18,1692.6 1405.05,1692.6 1406.35,1693.9 1416.96,1704.51 cw(c1421.2,1700.26) 1425.44,1704.51 1434.25,1695.7 ccw(c1438.49,1699.95) 1442.73,1695.7 ccw(c1438.49,1699.95) 1442.73,1704.19 1433.93,1712.99 cw(c1438.17,1717.24) 1433.93,1721.48 1442.34,1729.89 1516,1803.55 1516,1811 1516,1826 cw(c1522,1826) 1522,1832 1524.23,1832 ccw(c1524.23,1838) 1524.23,1844 1521,1844 cw(c1521,1850) 1521,1856 1524.23,1856 ccw(c1524.23,1862) 1524.23,1868 1521,1868 cw(c1521,1874) 1521,1880 1524.23,1880 ccw(c1524.23,1886) 1524.23,1892 1521,1892 cw(c1521,1898) 1521,1904 1524.23,1904 ccw(c1524.23,1910) 1524.23,1916 1522,1916 cw(c1522,1922) 1516,1922 1516,1950.47 1516,1960.42 1516,1996.28 1516,2003.28 1516,2006.28 ccw(c1510,2006.28) 1510,2012.28 1456.11,2012.28 cw(c1456.11,2018.28) 1456.11,2024.28 1515.68,2024.28 ccw(c1515.68,2030.28) 1515.68,2036.28 1456.11,2036.28 cw(c1456.11,2042.28) 1456.11,2048.28 1515.68,2048.28 ccw(c1515.68,2054.28) 1515.68,2060.28 1456.11,2060.28 cw(c1456.11,2066.28) 1456.11,2072.28 1515.68,2072.28 ccw(c1515.68,2078.28) 1515.68,2084.28 1456.11,2084.28 cw(c1456.11,2090.28) 1456.11,2096.28 1515.68,2096.28 ccw(c1515.68,2102.28) 1515.68,2108.28 1456.11,2108.28 cw(c1456.11,2114.28) 1456.11,2120.28 1515.68,2120.28 ccw(c1515.68,2126.28) 1515.68,2132.28 1456.11,2132.28 cw(c1456.11,2138.28) 1456.11,2144.28 1515.68,2144.28 ccw(c1515.68,2150.28) 1515.68,2156.28 1456.11,2156.28 cw(c1456.11,2162.28) 1456.11,2168.28 1515.68,2168.28 ccw(c1515.68,2174.28) 1515.68,2180.28 1462.42,2180.28 cw(c1462.42,2186.28) 1462.42,2192.28 1510,2192.28 ccw(c1510,2198.28) 1516,2198.28 1516,2209.81 1516,2214.09 1513.42,2216.68 v1(1513.42,2246.84)
  other v2: 1323.73,1692.85
FMC_NBL1: U7.39 U8.170 | length 1952.1
  Top Layer w6: U8.170@1284.88,1642.95 1284.88,1685 v2@1292.48,1692.6 ; U7.39@1481.46,1850 v1(1481.46,1910)
  Bottom Layer w6: v2(1295.16,1698.27) 1298.15,1698.27 1314.88,1715 1400,1715 1405.05,1720.05 1407.17,1722.17 ccw(c1402.93,1726.41) 1407.17,1730.66 1403.8,1734.03 cw(c1408.05,1738.27) 1403.8,1742.51 cw(c1408.05,1738.27) 1412.29,1742.51 1419.9,1734.9 ccw(c1424.14,1739.14) 1428.38,1734.9 ccw(c1424.14,1739.14) 1428.39,1743.38 1420.77,1751 cw(c1425.02,1755.24) 1429.26,1759.48 1436.87,1751.87 ccw(c1441.11,1756.11) 1445.36,1751.87 ccw(c1441.11,1756.11) 1445.36,1760.36 1437.74,1767.97 cw(c1441.99,1772.21) 1437.74,1776.45 cw(c1441.99,1772.21) 1446.23,1776.45 1453.84,1768.84 ccw(c1458.08,1773.08) 1462.33,1768.84 ccw(c1458.08,1773.08) 1462.33,1777.33 1454.71,1784.94 cw(c1458.96,1789.18) 1454.71,1793.42 cw(c1458.96,1789.18) 1463.2,1793.42 1470.81,1785.81 ccw(c1475.05,1790.05) 1479.3,1794.3 1471.69,1801.91 cw(c1475.93,1806.15) 1471.69,1810.39 cw(c1475.93,1806.15) 1480.17,1810.39 1483.54,1807.02 ccw(c1487.78,1811.27) 1492.02,1807.02 1500.45,1815.45 1500.45,1815.98 1500.45,1817.74 1500.45,1827.26 ccw(c1494.45,1827.26) 1494.45,1833.26 1429.65,1833.26 cw(c1429.65,1839.26) 1429.65,1845.26 1495.45,1845.26 ccw(c1495.45,1851.26) 1495.45,1857.26 1429.65,1857.26 cw(c1429.65,1863.26) 1429.65,1869.26 1494.45,1869.26 ccw(c1494.45,1875.26) 1500.45,1875.26 1500.45,1890.26 1500.45,1946.76 1454.25,1992.96 1451.25,1992.96 1430.46,1992.97 cw(c1430.46,1998.97) 1424.46,1998.97 1424.46,2010.16 ccw(c1418.46,2010.16) 1412.46,2010.16 1412.46,1998.14 cw(c1406.46,1998.14) 1400.46,1998.14 1400.46,2010.16 ccw(c1394.46,2010.16) 1388.46,2010.16 1388.46,1998.14 cw(c1382.46,1998.14) 1376.46,1998.14 1376.46,2010.16 ccw(c1370.46,2010.16) 1364.46,2010.16 1364.46,1998.14 cw(c1358.46,1998.14) 1352.46,1998.14 1352.46,2010.16 ccw(c1346.46,2010.16) 1340.46,2010.16 1340.46,1998.14 cw(c1334.46,1998.14) 1328.46,1998.14 1328.46,2010.16 ccw(c1322.46,2010.16) 1316.46,2010.16 1316.46,1998.14 cw(c1310.46,1998.14) 1304.46,1998.14 1304.46,2010.16 ccw(c1298.46,2010.16) 1292.46,2010.16 1292.46,1998.14 cw(c1286.46,1998.14) 1280.46,1998.14 1280.46,2010.16 ccw(c1274.46,2010.16) 1268.46,2010.16 1268.46,1998.14 cw(c1262.46,1998.14) 1256.46,1998.14 1256.46,2010.16 ccw(c1250.46,2010.16) 1244.46,2010.16 1244.46,1998.14 cw(c1238.46,1998.14) 1232.46,1998.14 1232.46,2010.16 ccw(c1226.46,2010.16) 1220.46,2010.16 1220.46,1999.13 cw(c1214.46,1999.13) 1214.46,1993.13 1211.46,1993.14 1208.46,1993.14 1192.7,1977.38 1192.7,1954.29 1210.86,1936.14 1455.32,1936.14 v1(1481.46,1910)
FMC_SDCKE0: U7.37 U8.35 | length 1975.6
  Top Layer w6: v2@1045.15,902.8 U8.35@1095.91,902.8 ; U7.37@1418.47,1850 v1(1418.47,1899.76)
  SIGNAL w6: v1(810.58,1979.18) 810.58,1294.7 880.28,1225 880.28,1151.44 925.07,1106.65 925.07,1029.51 v2(1049.4,905.18)
  Bottom Layer w6: v1(810.58,1979.18) 851.04,2019.64 1018.9,2019.64 1134.21,1904.33 1134.21,1903.47 1153.22,1884.47 1274.18,1884.47 1307.14,1917.43 1400.86,1917.43 v1(1418.47,1899.76) v1(1418.47,1899.76)
FMC_SDCLK: U7.38 U8.112 | length 2008.7
  Top Layer w6: v1@1445.87,1902.16 1445.87,1854.09 U7.38@1449.96,1850
  Top Layer w8: U8.112@2084.09,1178.39 2114.83,1178.39 2118.65,1174.57 v2(2136.76,1174.57)
  SIGNAL w6: v1@1445.87,1902.16 1445.87,1927.01 1476.16,1957.29 1508.09,1957.29 1523.09,1957.29 cw(c1523.09,1951.29) 1529.09,1951.29 1529.09,1946.59 ccw(c1535.09,1946.59) 1541.09,1946.59 1541.09,1952.29 cw(c1547.09,1952.29) 1553.09,1952.29 1553.09,1946.59 ccw(c1559.09,1946.59) 1565.09,1946.59 1565.09,1952.29 cw(c1571.09,1952.29) 1577.09,1952.29 1577.09,1946.59 ccw(c1583.09,1946.59) 1589.09,1946.59 1589.09,1952.29 cw(c1595.09,1952.29) 1601.09,1952.29 1601.09,1947.42 ccw(c1607.09,1947.42) 1613.09,1947.42 1613.09,1952.29 cw(c1619.09,1952.29) 1625.09,1952.29 1625.09,1946.59 ccw(c1631.09,1946.59) 1637.09,1946.59 1637.09,1952.29 cw(c1643.09,1952.29) 1649.09,1952.29 1649.09,1946.59 ccw(c1655.09,1946.59) 1661.09,1946.59 1661.09,1952.29 cw(c1667.09,1952.29) 1673.09,1952.29 1673.09,1946.59 ccw(c1679.09,1946.59) 1685.09,1946.59 1685.09,1952.29 cw(c1691.09,1952.29) 1697.09,1952.29 1697.09,1946.59 ccw(c1703.09,1946.59) 1709.09,1946.59 1709.09,1952.29 cw(c1715.09,1952.29) 1721.09,1952.29 1721.09,1946.59 ccw(c1727.09,1946.59) 1733.09,1946.59 1733.09,1952.29 cw(c1739.09,1952.29) 1745.09,1952.29 1745.09,1946.59 ccw(c1751.09,1946.59) 1757.09,1946.59 1757.09,1952.29 cw(c1763.09,1952.29) 1769.09,1952.29 1769.09,1946.59 ccw(c1775.09,1946.59) 1781.09,1946.59 1781.09,1952.29 cw(c1787.09,1952.29) 1793.09,1952.29 1793.09,1946.59 ccw(c1799.09,1946.59) 1805.09,1946.59 1805.09,1952.29 cw(c1811.09,1952.29) 1817.09,1952.29 1817.09,1946.59 ccw(c1823.09,1946.59) 1829.09,1946.59 1829.09,1952.29 cw(c1835.09,1952.29) 1841.09,1952.29 1841.09,1946.59 ccw(c1847.09,1946.59) 1853.09,1946.59 1853.09,1952.29 cw(c1859.09,1952.29) 1865.09,1952.29 1865.09,1946.59 ccw(c1871.09,1946.59) 1877.09,1946.59 1877.09,1951.29 cw(c1883.09,1951.29) 1883.09,1957.29 1901.3,1957.29 2107.53,1957.29 2177.52,1887.3 2177.52,1215.33 v2(2136.76,1174.57)
  other v1: 1445.36,1903.28
FMC_SDNCAS: U7.17 U8.160 | length 1957.2
  Top Layer w8: U7.17@1449.96,2294.26 v1(1449.96,2349.72) ; U8.160@1481.73,1643.71 v2@1481.73,1692.6
  Bottom Layer w6: v1@1449.96,2350.8 1463.64,2364.49 1497.41,2364.49 1503.1,2358.79 1505.23,2356.67 ccw(c1509.47,2360.91) 1513.71,2356.67 1516.94,2359.89 cw(c1521.18,2355.65) 1525.42,2359.89 cw(c1521.18,2355.65) 1525.42,2351.4 1521.49,2347.47 ccw(c1525.73,2343.23) 1521.49,2338.99 ccw(c1525.73,2343.23) 1529.98,2338.99 1533.91,2342.92 cw(c1538.15,2338.68) 1542.39,2334.43 1539.17,2331.21 ccw(c1543.41,2326.97) 1539.17,2322.72 1545.74,2316.15 1546.16,2315.73 1546.16,2312.73 ccw(c1552.16,2312.73) 1552.16,2306.73 1552.67,2306.73 cw(c1552.67,2300.73) 1552.67,2294.73 1551.16,2294.73 ccw(c1551.16,2288.73) 1551.16,2282.73 1552.67,2282.73 cw(c1552.67,2276.73) 1552.67,2270.73 1552.16,2270.73 ccw(c1552.16,2264.73) 1546.16,2264.73 1546.16,2244.76 1546.16,2239.92 1546.16,2224.32 ccw(c1552.16,2224.32) 1552.16,2218.32 1554.03,2218.32 cw(c1554.03,2212.32) 1554.03,2206.32 1544.41,2206.32 ccw(c1544.41,2200.32) 1544.41,2194.32 1554.03,2194.32 cw(c1554.03,2188.32) 1554.03,2182.32 1544.41,2182.32 ccw(c1544.41,2176.32) 1544.41,2170.32 1581.94,2170.32 cw(c1581.94,2164.32) 1581.94,2158.32 1544.41,2158.32 ccw(c1544.41,2152.32) 1544.41,2146.32 1581.94,2146.32 cw(c1581.94,2140.32) 1581.94,2134.32 1544.41,2134.32 ccw(c1544.41,2128.32) 1544.41,2122.32 1581.94,2122.32 cw(c1581.94,2116.32) 1581.94,2110.32 1544.41,2110.32 ccw(c1544.41,2104.32) 1544.41,2098.32 1581.94,2098.32 cw(c1581.94,2092.32) 1581.94,2086.32 1544.41,2086.32 ccw(c1544.41,2080.32) 1544.41,2074.32 1581.94,2074.32 cw(c1581.94,2068.32) 1581.94,2062.32 1544.41,2062.32 ccw(c1544.41,2056.32) 1544.41,2050.32 1581.94,2050.32 cw(c1581.94,2044.32) 1581.94,2038.32 1544.41,2038.32 ccw(c1544.41,2032.32) 1544.41,2026.32 1581.94,2026.32 cw(c1581.94,2020.32) 1581.94,2014.32 1544.41,2014.32 ccw(c1544.41,2008.32) 1544.41,2002.32 1581.94,2002.32 cw(c1581.94,1996.32) 1581.94,1990.32 1544.41,1990.32 ccw(c1544.41,1984.32) 1544.41,1978.32 1581.94,1978.32 cw(c1581.94,1972.32) 1581.94,1966.32 1544.41,1966.32 ccw(c1544.41,1960.32) 1544.41,1954.32 1581.94,1954.32 cw(c1581.94,1948.32) 1581.94,1942.32 1552.16,1942.32 ccw(c1552.16,1936.32) 1546.16,1936.32 1546.16,1921.32 1546.16,1911.09 1546.16,1898.54 ccw(c1552.16,1898.54) 1552.16,1892.54 1552.42,1892.54 cw(c1552.42,1886.54) 1552.42,1880.54 1551.16,1880.54 ccw(c1551.16,1874.54) 1551.16,1868.54 1552.42,1868.54 cw(c1552.42,1862.54) 1552.42,1856.54 1551.16,1856.54 ccw(c1551.16,1850.54) 1551.16,1844.54 1552.42,1844.54 cw(c1552.42,1838.54) 1552.42,1832.54 1551.16,1832.54 ccw(c1551.16,1826.54) 1551.16,1820.54 1552.42,1820.54 cw(c1552.42,1814.54) 1552.42,1808.54 1552.16,1808.54 ccw(c1552.16,1802.54) 1546.16,1802.54 1546.16,1787.54 1546.16,1757.03 v2@1481.73,1692.6
  Bottom Layer w8: v1(1449.96,2349.72) v1@1449.96,2350.8
  other v2: 1481.48,1692.85
FMC_SDNE0: U7.19 U8.34 | length 2019.7
  Top Layer w6: v2@1045.79,930.59 1046.94,929.44 1057.67,929.44 1064.63,922.48 U8.34@1095.91,922.48 ; v1(1376.67,2342.21) 1385.68,2333.2 1385.68,2295.55 U7.19@1386.97,2294.26
  SIGNAL w6: v2@1045.79,930.59 946.79,1029.6 946.79,1193.45 830.98,1309.25 830.98,2065.55 1107.64,2342.21 1137.1,2342.21 1152.1,2342.21 cw(c1152.1,2336.21) 1158.1,2336.21 1158.1,2336.12 ccw(c1164.1,2336.12) 1170.1,2336.12 1170.1,2337.21 cw(c1176.1,2337.21) 1182.1,2337.21 1182.1,2336.12 ccw(c1188.1,2336.12) 1194.1,2336.12 1194.1,2336.21 cw(c1200.1,2336.21) 1200.1,2342.21 1226.42,2342.21 v1(1376.67,2342.21)
  other v2: 1045.54,930.85
FMC_SDNRAS: U7.18 U8.59 | length 1951.1
  Top Layer w6: v1(1418.47,2222.22) U7.18@1418.47,2294.26 ; v1@1440.17,720.34 1440.17,656.96 U8.59@1442.36,654.77
  SIGNAL w6: v2@1055.09,1749.23 1056.24,1748.08 1056.24,1740.29 1059.91,1736.62 1059.91,1431.3 1060,1431.21 1060,1388.5 1179.24,1269.26 1179.24,981.28 v1@1439.03,721.49 ; v2(1084.91,1780.21) 1087.47,1780.21 1407.9,2100.64 v1(1408.85,2100.64)
  Bottom Layer w6: v2@1055.09,1749.23 1055.09,1750.07 1084.91,1779.89 v2(1084.91,1780.21) ; v1(1408.85,2100.64) 1418.75,2110.54 1418.75,2221.94 v1(1418.47,2222.22)
  other v1: 1434.71,722.13
  other v2: 1054.84,1749.49
FMC_SDNWE: U7.16 U8.32 | length 2005.3
  Top Layer w6: v2@1045.72,955.38 1058.67,955.38 1065.15,961.85 U8.32@1095.91,961.85 ; v1(1468.03,2243.19) 1474.14,2243.19 1481.46,2250.51 U7.16@1481.46,2294.26
  SIGNAL w6: v2@1045.72,955.38 967.99,1033.11 967.99,1212.38 850.04,1330.32 850.04,2056.25 1054.92,2261.13 1385.28,2261.13 1403.22,2243.19 v1(1468.03,2243.19)
  other v2: 1045.47,955.63
G0: J5.13 U8.4 | length 2307.6
  Top Layer w6: v2@1036.29,1513.25 1036.4,1513.14 1095.8,1513.14 U8.4@1095.91,1513.03 ; J5.13@1172.36,263.94 1173.24,263.07 v2(1173.24,183.65)
  Bottom Layer w6: v2@1036.29,1513.25 840.43,1513.25 602.78,1275.6 602.78,236.21 659.72,179.27 1168.86,179.27 v2(1173.24,183.65)
  other v2: 1037.81,1511.98
G1: J5.14 U8.5 | length 1469.4
  Top Layer w6: v1(1162.05,309.93) 1170.61,309.93 1189.14,291.4 1189.14,266.85 J5.14@1192.05,263.94
  Top Layer w8: U8.5@1095.91,1493.35 1147.28,1493.35 v2@1155,1485.63
  Bottom Layer w6: v2@1155,1485.63 1155,1445 1110.37,1400.37 1110.37,690.37 991.13,571.13 991.13,556.2 991.13,430.87 1112.07,309.93 v1(1162.05,309.93)
  other v2: 1154.75,1485.88
G2: J5.15 U8.128 | length 1995.8
  Top Layer w8: J5.15@1211.74,263.94 1213.64,265.85 1213.64,346.29 v2(1214.26,346.91) v2@1214.87,347.53 ; v1(2014.76,1485.59) 2015.88,1486.71 2047.97,1486.71 2054.61,1493.35 U8.128@2084.09,1493.35
  Bottom Layer w8: v2@1214.87,347.53 1214.87,347.88 1215.24,348.25 1215.24,462.85 1259.91,507.52 1259.91,1364.58 1383.46,1488.14 v1@2011.41,1488.14
G3: J5.16 U8.129 | length 1986.8
  Top Layer w8: J5.16@1231.41,263.94 1231.41,335.78 v2(1231.92,336.29) ; v1(1983.19,1469.14) 1983.19,1472.93 1990.88,1480.62 1990.88,1492.22 2011.69,1513.03 U8.129@2084.09,1513.03
  Bottom Layer w8: v2(1231.92,336.29) 1231.92,449.78 1279.68,497.54 1279.68,1340.97 1407.62,1468.91 1987.38,1468.91 v1@1988.1,1469.63
G4: J5.17 U8.130 | length 1970.8
  Top Layer w8: J5.17@1251.11,263.94 1251.11,343.36 v2(1251.92,344.18) ; v1(1955.86,1449.91) 1959.97,1454.02 1959.97,1488.89 2003.81,1532.72 U8.130@2084.09,1532.72
  Bottom Layer w8: v2(1251.92,344.18) 1251.92,435.82 1303.21,487.11 1303.21,1326.46 1424.76,1448.01 1953.96,1448.01 v1(1955.86,1449.91)
G5: J5.18 U8.131 | length 1966.2
  Top Layer w8: v2(1269.89,326.91) 1269.89,264.83 J5.18@1270.78,263.94 ; v1(1929.72,1429.01) 1934.53,1433.82 1934.53,1493.71 1989.11,1548.29 2049.24,1548.29 2053.35,1552.4 U8.131@2084.09,1552.4
  Bottom Layer w8: v2(1269.89,326.91) 1269.89,357 1360.44,447.54 1360.44,1349.47 1439.97,1429.01 v1(1929.72,1429.01)
G6: J5.19 U8.132 | length 1966.6
  Top Layer w8: v2(1290,311.77) 1290.47,311.3 J5.19@1290.47,263.94 ; v1(1902.38,1409.68) 1908.33,1415.63 1908.33,1508.28 1964.53,1564.47 2026.04,1564.47 2033.66,1572.09 U8.132@2084.09,1572.09
  Bottom Layer w8: v2(1290,311.77) 1290,355.84 1396.63,462.47 1396.63,1354.13 1447.71,1405.21 1896.83,1405.21 1901.3,1409.68 v1(1902.38,1409.68)
G7: J5.20 U8.133 | length 1972.7
  Top Layer w8: v2(1308.25,298.41) 1309.01,297.65 1309.01,265.08 J5.20@1310.16,263.94 ; v1(1862.25,1385.29) 1875.43,1398.46 1875.43,1516.56 1946.43,1587.56 1988.24,1587.56 2013.23,1612.55 U8.133@2013.23,1642.95
  Bottom Layer w8: v2(1308.25,298.41) 1308.25,349.29 1414.63,455.67 1414.63,1055.62 1414.63,1073.62 cw(c1422.63,1073.62) 1422.63,1081.62 1423.38,1081.62 ccw(c1423.38,1088.62) 1423.38,1095.62 1420.63,1095.62 cw(c1420.63,1102.62) 1420.63,1109.62 1423.38,1109.62 ccw(c1423.38,1116.62) 1423.38,1123.62 1422.63,1123.62 cw(c1422.63,1131.62) 1414.63,1131.62 1414.63,1151.47 1414.63,1340.39 1459.94,1385.69 1861.85,1385.69 v1(1862.25,1385.29)